# EAGLE board Undergrad Project (EAGLE 9.7.0)

Size 213.31 x 164.55 mm. Coordinates in mm from the lower left corner, seen from the top.
Outline: 0,0 213.31,0 213.31,164.55 0,164.55 0,0
Copper layers (1*16): Top 0.035mm / dielectric 1.5mm / Bottom 0.035mm
Design rules "default": minimum track width 6mil, minimum drill 0.35mm, track to track 6mil, track to pad 6mil, pad to pad 6mil, via to via 6mil, smd to smd 6mil, copper to edge 40mil, drill to drill 6mil, minimum pad ring 10mil, minimum via ring 8mil, stop-mask expansion 4mil, vias tented up to drill 0mil, thermal gap 10mil

## Footprints (pad centres in the part's own frame; a part is rotated, then mirrored left to right if it is on the bottom)
LEDRD254W60D565H860B = drill 0.981 pad 1.581: 1 -1.27,0; 2 1.27,0
RESAD1016W63L850D250B = drill 0.83 pad 1.43: 1 -5.08,0; 2 5.08,0
HA-06-SM065 = drill 1 pad 1.676: 1 -2.54,-2.54; 2 0,2.54; 3 2.54,-2.54
SWITCH-MOMENTARY-PTH-6.5MM = drill 1.016 pad 1.88: 1 -3.251,2.261; 2 3.251,2.261; 3 -3.251,-2.261; 4 3.251,-2.261
ARDUINO-UNO-R3-SHIELD = drill 1.016 pad 1.88: 3.3V 24.13,-2.54; 5V 24.13,0; A0 24.13,12.7; A1 24.13,15.24; A2 24.13,17.78; A3 24.13,20.32; A4 24.13,22.86; A5 24.13,25.4; AREF -24.13,-13.97; D2 -24.13,20.32; D3 -24.13,17.78; D4 -24.13,15.24; D5 -24.13,12.7; D6 -24.13,10.16; D7 -24.13,7.62; D8 -24.13,3.81; D9 -24.13,1.27; D10 -24.13,-1.27; D11 -24.13,-3.81; D12 -24.13,-6.35; D13 -24.13,-8.89; GND@0 24.13,2.54; GND@1 24.13,5.08; GND@2 -24.13,-11.43; IOREF 24.13,-7.62; NC 24.13,-10.16; RES 24.13,-5.08; RX -24.13,25.4; SCL -24.13,-19.05; SDA -24.13,-16.51; TX -24.13,22.86; VIN 24.13,7.62
JHD-162A = drill 1.016 long: 1 -19.05,0; 2 -16.51,0; 3 -13.97,0; 4 -11.43,0; 5 -8.89,0; 6 -6.35,0; 7 -3.81,0; 8 -1.27,0; 9 1.27,0; 10 3.81,0; 11 6.35,0; 12 8.89,0; 13 11.43,0; 14 13.97,0; 15 16.51,0; 16 19.05,0
DIL16 = drill 0.813 long: 1 -8.89,-3.81; 2 -6.35,-3.81; 3 -3.81,-3.81; 4 -1.27,-3.81; 5 1.27,-3.81; 6 3.81,-3.81; 7 6.35,-3.81; 8 8.89,-3.81; 9 8.89,3.81; 10 6.35,3.81; 11 3.81,3.81; 12 1.27,3.81; 13 -1.27,3.81; 14 -3.81,3.81; 15 -6.35,3.81; 16 -8.89,3.81

## Placement (x,y rotation side)
D1  RED  [LEDRD254W60D565H860B]  18.03,8.05 180 top
D2  RED  [LEDRD254W60D565H860B]  23.11,8.05 180 top
D3  RED  [LEDRD254W60D565H860B]  28.19,8.05 180 top
D4  RED  [LEDRD254W60D565H860B]  33.27,8.05 180 top
D5  RED  [LEDRD254W60D565H860B]  38.35,8.05 180 top
D6  RED  [LEDRD254W60D565H860B]  43.43,8.05 180 top
D7  RED  [LEDRD254W60D565H860B]  48.51,8.05 180 top
D9  RED  [LEDRD254W60D565H860B]  89.15,8.05 180 top
D10  RED  [LEDRD254W60D565H860B]  84.07,8.05 180 top
D11  RED  [LEDRD254W60D565H860B]  78.99,8.05 180 top
D12  RED  [LEDRD254W60D565H860B]  73.91,8.05 180 top
D13  RED  [LEDRD254W60D565H860B]  68.83,8.05 180 top
R1  220  [RESAD1016W63L850D250B]  174.2,79.85 90 top
R2  220  [RESAD1016W63L850D250B]  47.24,20.75 90 top
R3  220  [RESAD1016W63L850D250B]  42.16,20.75 90 top
R4  220  [RESAD1016W63L850D250B]  37.08,20.75 90 top
R5  220  [RESAD1016W63L850D250B]  32,20.75 90 top
R6  220  [RESAD1016W63L850D250B]  26.92,20.75 90 top
R7  220  [RESAD1016W63L850D250B]  21.84,20.75 90 top
R8  220  [RESAD1016W63L850D250B]  16.76,20.75 90 top
R9  220  [RESAD1016W63L850D250B]  67.56,20.75 90 top
R10  220  [RESAD1016W63L850D250B]  72.64,20.75 90 top
R11  220  [RESAD1016W63L850D250B]  77.72,20.75 90 top
R12  220  [RESAD1016W63L850D250B]  82.8,20.75 90 top
R13  220  [RESAD1016W63L850D250B]  87.88,20.75 90 top
RPOT1  250k  [HA-06-SM065]  133.56,74.77 0 top
RPOT2  250k  [HA-06-SM065]  54.86,15.67 0 top
S1  SWITCH_MOMENTARY  [SWITCH-MOMENTARY-PTH-6.5MM]  62.48,19.48 90 top
U1  ARDUINO-UNO-R3-SHIELD  [ARDUINO-UNO-R3-SHIELD]  47.88,134.7 270 top
U2  LCD-16X2JHD-162A  [JHD-162A]  157.69,64.74 0 top
U3  PCF8574DIP16  [DIL16]  25.61,78.58 0 top
U4  PCF8574DIP16  [DIL16]  61.17,78.58 0 top

## Library data of the parts
D1-D7 D9-D13 = Tinkercad; CATEGORY: Opto-Electronic; SUB-CATEGORY: LED; VALUE: LED_RED
R1-R13 RPOT1 RPOT2 S1 U1-U4 = Tinkercad

## Nets
D1_C: D1.2 R8.1
D2_C: D2.2 R7.1
D3_C: D3.2 R6.1
D4_C: D4.2 R5.1
D5_C: D5.2 R4.1
D6_C: D6.2 R3.1
D7_C: D7.2 R2.1
D9_C: D9.2 R13.1
D10_C: D10.2 R12.1
D11_C: D11.2 R11.1
D12_C: D12.2 R10.1
D13_C: D13.2 R9.1
U1_5V: D1.1 D2.1 D3.1 D4.1 D5.1 D6.1 D7.1 D9.1 D10.1 D11.1 D12.1 D13.1 R1.2 RPOT1.1 RPOT2.3 U1.5V U2.2 U3.16 U4.1 U4.16
U1_A0: RPOT2.2 U1.A0
U1_A4: U1.A4 U3.15 U4.15
U1_A5: U1.A5 U3.14 U4.14
U1_D2: U1.D2 U2.4
U1_D3: U1.D3 U2.6
U1_D4: U1.D4 U2.11
U1_D5: U1.D5 U2.12
U1_D6: U1.D6 U2.13
U1_D7: U1.D7 U2.14
U1_D8: S1.1 S1.2 U1.D8
U1_GND: RPOT1.3 RPOT2.1 S1.3 S1.4 U1.GND@0 U1.GND@1 U1.GND@2 U2.1 U2.5 U2.16 U3.1 U3.2 U3.3 U3.8 U3.12 U4.2 U4.3 U4.8 U4.10 U4.11 U4.12
U2_LED+: R1.1 U2.15
U2_VO: RPOT1.2 U2.3
U3_P0: R2.2 U3.4
U3_P1: R3.2 U3.5
U3_P2: R4.2 U3.6
U3_P3: R5.2 U3.7
U3_P4: R6.2 U3.9
U3_P5: R7.2 U3.10
U3_P6: R8.2 U3.11
U4_P0: R9.2 U4.4
U4_P1: R10.2 U4.5
U4_P2: R11.2 U4.6
U4_P3: R12.2 U4.7
U4_P4: R13.2 U4.9

## Tracks (layer width: path | path; a pad name or v marks a point on that pad's centre or on a via)
D1_C  (1 unrouted)
D2_C  (1 unrouted)
D3_C  (1 unrouted)
D4_C  (1 unrouted)
D5_C  (1 unrouted)
D6_C  (1 unrouted)
D7_C  (1 unrouted)
D9_C  (1 unrouted)
D10_C  (1 unrouted)
D11_C  (1 unrouted)
D12_C  (1 unrouted)
D13_C  (1 unrouted)
U1_5V  (19 unrouted)
U1_A0  (1 unrouted)
U1_A4  (2 unrouted)
U1_A5  (2 unrouted)
U1_D2  (1 unrouted)
U1_D3  (1 unrouted)
U1_D4  (1 unrouted)
U1_D5  (1 unrouted)
U1_D6  (1 unrouted)
U1_D7  (1 unrouted)
U1_D8  (2 unrouted)
U1_GND  (20 unrouted)
U2_LED+  (1 unrouted)
U2_VO  (1 unrouted)
U3_P0  (1 unrouted)
U3_P1  (1 unrouted)
U3_P2  (1 unrouted)
U3_P3  (1 unrouted)
U3_P4  (1 unrouted)
U3_P5  (1 unrouted)
U3_P6  (1 unrouted)
U4_P0  (1 unrouted)
U4_P1  (1 unrouted)
U4_P2  (1 unrouted)
U4_P3  (1 unrouted)
U4_P4  (1 unrouted)